# Altium PCB Hexbot_电源.PcbDoc
Units mm, origin at the board's own origin, x right, y up, seen from the top; angles counter-clockwise.
Board outline 79.95 x 69.34 mm, 2 copper layers (Top Layer, Bottom Layer); 25 components, 13 nets, 100 pads, 4 vias.
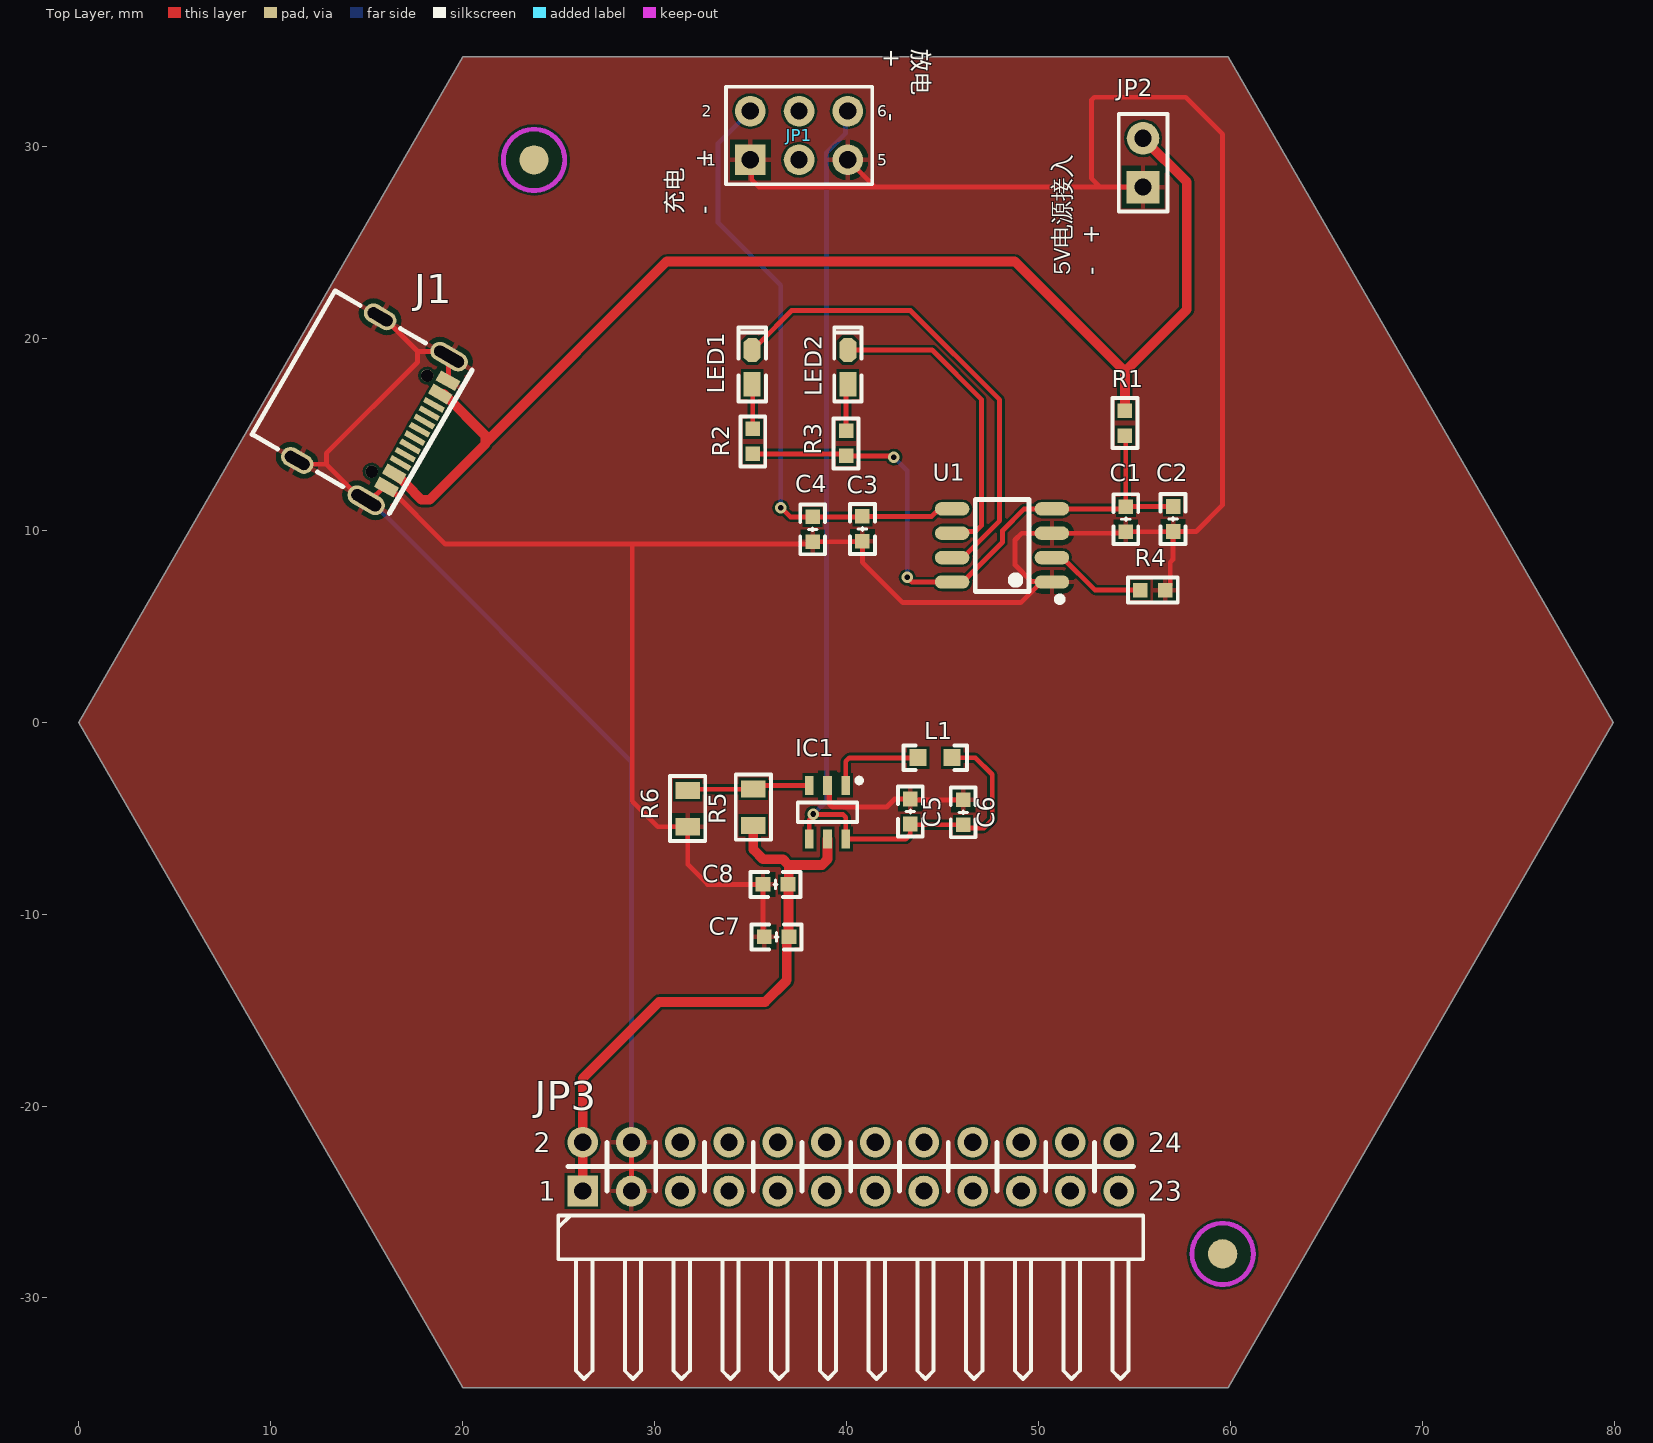
[diagram p0: Top Layer view]
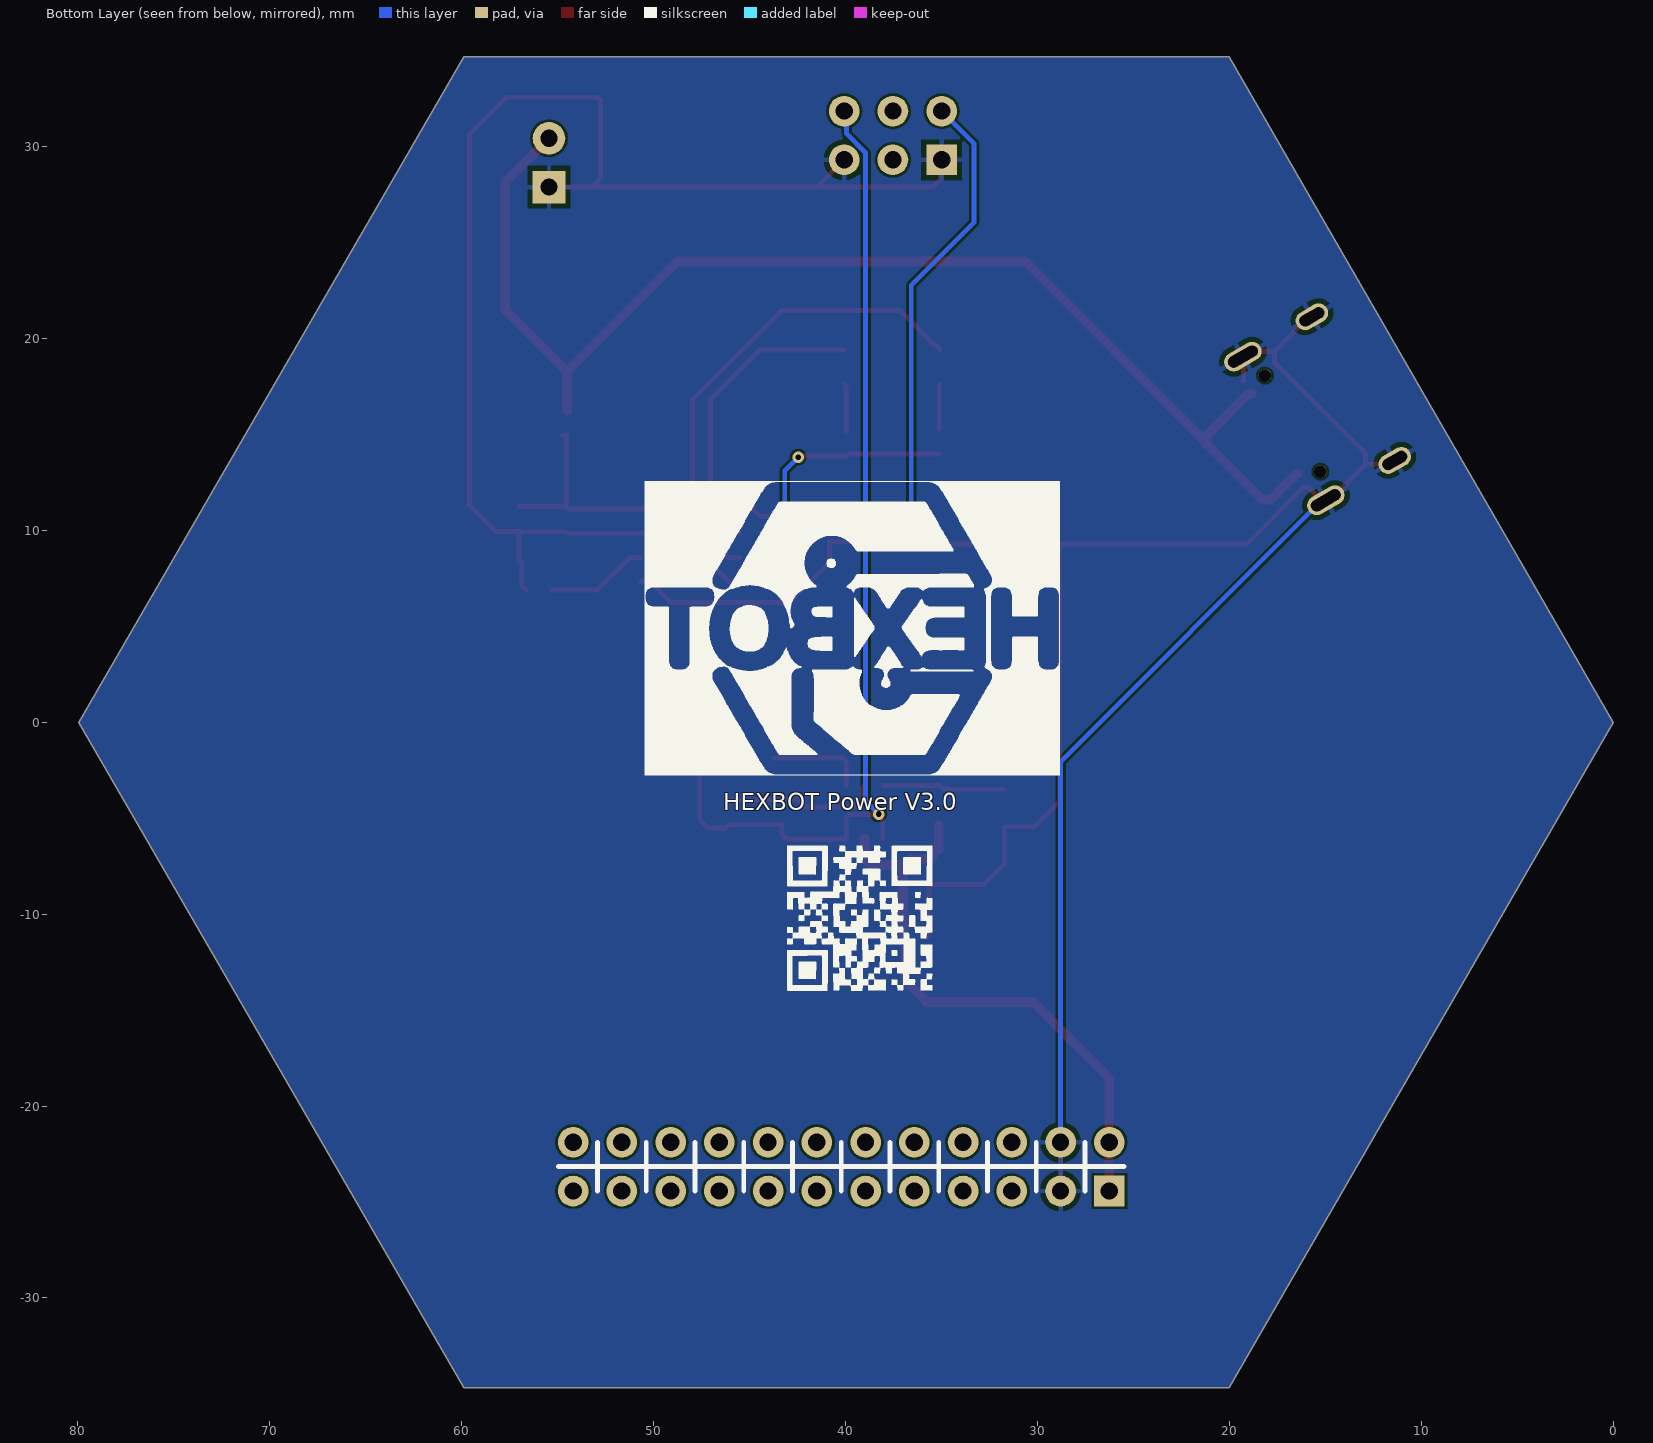
[diagram p1: Bottom Layer view, seen from below]

## Layer stack, top to bottom
Top Solder: solder mask 0.0102, Solder Resist, Dk 3.5
Top Layer: signal copper 0.0356
Dielectric 1: dielectric 0.32, FR-4, Dk 4.8
Bottom Layer: signal copper 0.0356
Bottom Solder: solder mask 0.0102, Solder Resist, Dk 3.5

## Board outline
20.005,-34.667 -0.005,-0.006 20.005,34.675 59.883,34.675 79.949,-0.006 59.883,-34.667

## Design rules (kind name [scope] priority, off if disabled: settings)
Clearance [All] p1: gap=0.127 ignorepadtopadclearanceinfootprint=FALSE
ComponentClearance [All] p1: gap=0 collisioncheckmode=3 verticalgap=0.254 showdistances=FALSE
MinimumSolderMaskSliver [All] p1: minsoldermaskwidth=0
PolygonConnect [All] p1: connectstyle=Relief reliefconductorwidth=0.254 reliefentries=4 polygonreliefangle="90 Angle" airgapwidth=0.254
RoutingVias [All] p1: holewidth=0.254 width=0.508 viastyle="Through Hole" minholewidth=0.254 minwidth=0.508 maxholewidth=0.711 maxwidth=1.27
SilkToSilkClearance [All] p1: silktosilkclearance=0
SilkToSolderMaskClearance [IsPad] p1: minsilkscreentomaskgap=0 clearancetoexposedcopper=TRUE
SolderMaskExpansion [All] p1: expansion=0.102 istentingtop=FALSE
Width [All] p1: maxlimit=0.508 minlimit=0.254 preferedwidth=0.254
26 further rules are at their usual default settings.

## Classes and differential pairs
component class hexbot_电源: C1 C2 C3 C4 C5 C6 C7 C8 IC1 J1 JP1 JP2 JP3 L1 LED1 LED2 R1 R2 R3 R4 R5 R6 U1

## Components (designator, comment, footprint, x,y, rotation, side; value= is the part's Value field where it differs from the comment)
C1 "10uF" "C 0603_L" 54.551,10.577 r90 top
C2 "0.1uF" "C 0603_L" 57.019,10.589 r90 top
C3 "10uF" "C 0603_L" 40.823,10.074 r90 top
C4 "0.1uF" "C 0603_L" 38.237,10.053 r90 top
C5 "10uF" "C 0603_L" 43.322,-4.65 r270 top
C6 "0.1uF" "C 0603_L" 46.08,-4.692 r270 top
C7 "10uF" "C 0603_L" 36.353,-11.184 r0 top
C8 "0.1uF" "C 0603_L" 36.3,-8.447 r0 top
IC1 "PS7516" SOT23-6L 39.009,-4.687 r180 top
J1 "Type-C" Type-C-16 14.645,16.842 r240 top
JP1 "Header3X2" HDR2.54-LI-2x3P 37.528,30.573 r0 top
JP2 "HDR-1X2" HDR2.54-LI-2P 55.45,29.154 r90 top
JP3 "Header 2X11" HDR2.54-WI-2x12P 40.22,-23.157 r0 top
L1 "10uH" "L 0603" 44.617,-1.847 r180 top
LED1 "红色" "LED 0603R" 35.091,18.507 r90 top
LED2 "红色" "LED 0603R" 40.075,18.507 r90 top
Mark1 "Mark" Mark 59.6,-27.7 r90 top
Mark2 "Mark" Mark 23.716,29.301 r90 top
R1 "0.5R" "R 0603_L" 54.503,15.585 r270 top
R2 "1K" "R 0603_L" 35.115,14.636 r90 top
R3 "1K" "R 0603_L" 39.977,14.531 r90 top
R4 "1.2K" "R 0603_L" 55.96,6.882 r180 top
R5 "525K" "R 0805_L" 35.143,-4.424 r270 top
R6 "100K" "R 0805_L" 31.726,-4.497 r90 top
U1 "TP4056_JX" TP4056 47.783,9.273 r90 top

## Footprints (in the part's own frame and the unit in brackets; to place one, negate y for a bottom-side part, rotate by r counter-clockwise, add the part's x,y. Pads: shape width x height; smd on the part's side, far side on the other; paste and mask are expansions set on the pad)
"C 0603_L" [mil] "无极性贴片电容                                       淘宝ID:黄晶宝石"
  rect 30x30 smd: 1(-25.59,0) 2(25.59,0)
  silkscreen extent -51,-26 51,26, body extent -31,-16 31,16, height 32
HDR2.54-LI-2P [mm] "封装库来自淘宝卖家 ID：黄晶宝石"
  rect 1.7x1.7 hole 0.9: 1(-1.27,0)
  round 1.7 hole 0.9: 2(1.27,0)
  silkscreen extent -2.54,-1.27 2.54,1.27, body extent -2.54,-1.27 2.54,1.27, height 8.5
HDR2.54-LI-2x3P [mm] "封装库来自淘宝卖家 ID：黄晶宝石"
  rect 1.6x1.6 hole 0.9: 1(-2.54,-1.27)
  round 1.6 hole 0.9: 2(-2.54,1.27) 3(0,-1.27) 4(0,1.27) 5(2.54,-1.27) 6(2.54,1.27)
  silkscreen extent -3.81,-2.54 3.81,2.54, body extent -3.81,-2.54 3.81,2.54, height 8.5
HDR2.54-WI-2x12P [mm] "双排弯脚排针，12x2脚  淘宝ID:黄晶宝石   店铺网址:https://shop463601444.taobao.com"
  rect 1.6x1.6 hole 0.9: 1(-13.97,-1.27)
  round 1.6 hole 0.9: 2(-13.97,1.27) 3(-11.43,-1.27) 4(-11.43,1.27) 5(-8.89,-1.27) 6(-8.89,1.27) 7(-6.35,-1.27) 8(-6.35,1.27) 9(-3.81,-1.27) 10(-3.81,1.27) 11(-1.27,-1.27) 12(-1.27,1.27) 13(1.27,-1.27) 14(1.27,1.27) 15(3.81,-1.27) 16(3.81,1.27) 17(6.35,-1.27) 18(6.35,1.27) 19(8.89,-1.27) 20(8.89,1.27) 21(11.43,-1.27) 22(11.43,1.27) 23(13.97,-1.27) 24(13.97,1.27)
  silkscreen extent -15.24,-11.06 15.24,1.27, body extent -15.24,-11.23 15.24,1.62, height 5.1
"L 0603" [mil] "小功率贴片电感        淘宝ID:黄晶宝石"
  rect 35x35 smd: 1(-35,0) 2(35,0)
  silkscreen extent -65,-25 65,25, body extent -31,-16 31,16, height 31
"LED 0603R" [mil] "红色0603LED                                           淘宝ID:黄晶宝石"
  rect 50x35 smd: 1(-35,0.26)
  oct 50x35 smd: 2(35,0.26)
  silkscreen extent -71,-28 81,28, body extent -31,-16 31,16, height 18
Mark [mil]
  round 60 smd mask+39.37: mark(0,0)
  Top Layer keep-out circle w10: c0,0 r62.99
"R 0603_L" [mil] "1/10W贴片电阻                 淘宝ID:黄晶宝石"
  rect 30x30 smd: 1(-25.59,0) 2(25.59,0)
  silkscreen extent -51,-26 51,26, body extent -31,-16 32,16, height 16
"R 0805_L" [mil] "1/8W贴片电阻"
  rect 35x50 smd: 1(-37.41,0) 2(37.4,0)
  silkscreen extent -67,-36 67,36, body extent -39,-25 39,25, height 20
SOT23-6L [mm] "3x1.6x1.1mm(长宽高) 封装库来自淘宝卖家 ID：黄晶宝石"
  rect 0.45x1 smd: 1(-0.95,-1.397) 2(0,-1.397) 3(0.95,-1.397) 4(0.95,1.397) 5(0,1.397) 6(-0.95,1.397)
  silkscreen extent -1.78,-1.78 1.55,0.51, body extent -1.5,-1.4 1.5,1.4, height 1.15
TP4056 [mm]
  oval 0.7x1.8 smd: 1(-1.966,-2.921) 2(-0.696,-2.921) 3(0.574,-2.921) 4(1.844,-2.921) 5(1.844,2.281) 6(0.574,2.281) 7(-0.696,2.281) 8(-1.966,2.281)
  silkscreen extent -3.01,-3.47 2.34,1.08
Type-C-16 [mm]
  rect 0.6x1.15 smd: 1(-3.116,3.496) 2(-2.316,3.496) 11(2.484,3.496) 12(3.284,3.496)
  rect 0.3x1.15 smd: 3(-1.666,3.496) 4(-1.166,3.496) 5(-0.666,3.496) 6(-0.166,3.496) 7(0.334,3.496) 8(0.834,3.496) 9(1.334,3.496) 10(1.834,3.496)
  oval 1x2.1 hole 0.6 slot 1.7 at 90 deg: 20(-4.236,2.921) 22(4.404,2.921)
  oval 1x1.8 hole 0.6 slot 1.4 at 90 deg: 21(-4.236,-1.228) 22(4.404,-1.228)
  round 0.65 hole 0.65 unplated: ""(-2.806,2.422) ""(2.974,2.422)
  silkscreen extent -4.23,-3.95 4.4,4.31

## Part data
C1 C2 C3 C4 C5 C6 C7 C8: library part C, "贴片电容", BOM名称=无极性贴片电容, 唯一出售店铺网址=https://shop463601444.taobao.com, 淘宝ID="封装库来自淘宝 ID：黄晶宝石", 联系售后，技术支持=https://shop463601444.taobao.com
IC1: library part SX1308, "可调升压芯片", BOM名称=可调升压芯片, 学习资源=www.ooocke.com, 版权归属="封装库来自淘宝 ID：黄晶宝石"
J1: library part Type-C-16pin
JP1: library part "Header 3X2", "3*2P接插件", BOM名称=3*2P接插件, 学习资源=https://shop463601444.taobao.com, 版权归属="封装库来自淘宝 ID：黄晶宝石"
JP2: library part "Header 2", "2P接插件", BOM名称=2P接插件, 版权归属="封装库来自淘宝 ID：黄晶宝石", 联系售后=https://shop463601444.taobao.com
JP3: library part "Header 12X2", "12*2P接插件", BOM名称=12*2P接插件, 学习资源=https://shop463601444.taobao.com, 版权归属="封装库来自淘宝卖家 ID：黄晶宝石"
L1: library part L, "小功率贴片电感", BOM名称=小功率贴片电感, 封装库来自淘宝卖家 ID：黄晶宝石=其他店铺购入均为盗版，不享受售后技术支持服务，请立即申请退款, 淘宝ID="封装库来自淘宝 ID：黄晶宝石", 联系售后=https://shop463601444.taobao.com
LED1 LED2: library part LED-SMD, "贴片LED", BOM名称=贴片LED, 学习资源=https://shop463601444.taobao.com, 版权归属="封装库来自淘宝 ID：黄晶宝石"
R1 R2 R3 R4 R5 R6: library part R, "贴片电阻", BOM名称=贴片电阻, 封装库来自淘宝卖家 ID：黄晶宝石=其他店铺购入均为盗版，不享受售后技术支持服务，请立即申请退款, 版权归属="来自淘宝 ID：黄晶宝石", 联系售后=https://shop463601444.taobao.com
U1: BOM_Supplier=LCSC, spicePre=U

## Via types
v1: diameter 0.6, hole 0.3, Top Layer to Bottom Layer, tented both sides, 4 vias

## Nets (pads, with @x,y where several pads share a name; then routed paths per layer and width w, separated by ;. In a path a pad name is that pad's centre, name@x,y a point inside that pad or via, vN(x,y) a via of type N, cw(c..) or ccw(c..) an arc to the next point about the centre after c; other vN are vias at no path point)
3V7: C5.2 C6.2 IC1.4 IC1.6 JP1.6 L1.1 | length 55
  Top Layer w0.254: IC1.4 38.059,-5.091 38.268,-4.881 v1(38.268,-4.788) 38.279,-4.798 39.81,-4.798 39.959,-4.947 IC1.6 43.082,-6.084 43.322,-5.843 C5.2 43.364,-5.342 C6.2 46.253,-5.516 47.153,-5.516 47.59,-5.079 47.59,-2.724 46.713,-1.847 L1.1
  Bottom Layer w0.254: v1(38.268,-4.788) 38.954,-4.102 38.954,29.68 39.936,30.662 39.936,31.712 JP1.6
5V: C7.2 C8.2 IC1.5 JP3.1 JP3.2 R5.2 | length 31.3
  Top Layer w0.508: JP3.1 JP3.2 26.25,-18.553 30.232,-14.571 35.759,-14.571 36.886,-13.444 36.886,-11.248 36.977,-11.157 36.977,-8.474 C8.2 36.987,-8.41 36.987,-7.436 ; R5.2 35.143,-6.628 35.653,-7.139 36.69,-7.139 36.987,-7.436 ; IC1.5 39.013,-6.087 39.013,-7.139 38.715,-7.436 36.987,-7.436
BAT: C3.2 C4.2 JP1.2 U1.5 | length 32
  Top Layer w0.254: v1(36.573,11.173) 36.595,11.173 37.066,10.703 C4.2 40.802,10.703 C3.2 44.438,10.724 44.831,11.118 U1.5
  Bottom Layer w0.254: JP1.2 33.295,30.15 33.295,26.046 36.573,22.767 v1(36.573,11.173)
FB: IC1.3 R5.1 R6.2 | length 6.4
  Top Layer w0.254: R6.2@31.734,-3.493 34.906,-3.493 34.911,-3.488 35.109,-3.29 IC1.3
GND: C1.1 C2.1 C3.1 C4.1 C5.1 C6.1 C7.1 C8.1 IC1.2 J1.1 J1.12 J1.20 J1.21 J1.22 JP1.1 JP1.5 JP2.1 JP3.3 JP3.4 R4.1 R6.1 U1.1 U1.3 | length 206.9
  Top Layer w0.254: J1.22@11.379,13.642 11.579,13.442 12.896,13.442 ; J1.21 15.845,21.124 17.645,19.324 ; J1.1 19.251,17.812 19.251,19.008 J1.20 19.018,19.324 17.645,19.324 ; JP3.3 JP3.4 ; JP1.1 35.058,29.233 35.058,28.271 35.445,27.884 41.487,27.884 ; C7.1 35.65,-11.131 C8.1 32.764,-8.447 31.726,-7.409 R6.1 30.17,-5.447 28.837,-4.114 28.837,9.284 ; IC1.2 39.107,-3.388 39.107,-4.269 39.256,-4.417 42.087,-4.417 42.504,-4 C5.1 43.364,-4.042 C6.1 ; JP1.5 41.487,27.884 ; U1.1@50.685,7.327 U1.1@50.173,7.327 ; JP2.1 53.224,27.884 ; R4.1 56.864,7.136 56.864,8.339 57.007,8.482 57.007,9.927 C1.1 54.471,9.848 U1.3 49.131,9.848 48.777,9.494 48.777,8.198 49.647,7.327 U1.1@50.173,7.327 ; C2.1 58.213,9.939 59.597,11.323 59.597,30.632 57.664,32.564 52.906,32.564 52.757,32.415 52.757,28.351 53.224,27.884 ; 12.896,13.442 12.896,14.009 17.645,18.758 17.645,19.324 ; 12.896,13.442 14.771,11.567 14.973,11.567 15.198,11.567 15.881,12.249 J1.12 16.131,12.249 19.097,9.284 28.837,9.284 ; 28.837,9.284 38.119,9.284 C4.1 40.802,9.403 C3.1 40.823,8.344 42.934,6.234 49.08,6.234 U1.1@50.173,7.327 ; 41.487,27.884 53.224,27.884
  Bottom Layer w0.254: J1.22@14.973,11.567 15.174,11.567 28.79,-2.05 JP3.4
LX: IC1.1 L1.2 | length 5.1
  Top Layer w0.254: IC1.1 39.959,-2.04 40.141,-1.857 43.717,-1.857 L1.2
NetC1_2: C1.2 C2.2 R1.2 R2.1 R3.1 U1.4 U1.8 | length 33.7
  Top Layer w0.254: R2.1 R3.1@39.85,13.986 ; R3.1 42.393,13.881 v1(42.463,13.811) ; v1(43.162,7.549) 43.404,7.308 U1.8 46.052,7.308 48.124,9.38 48.124,9.986 49.256,11.118 U1.4 54.441,11.118 C1.2 ; R1.2@54.752,14.935 R1.2 54.551,14.887 C1.2 ; C2.2 54.563,11.239 C1.2
  Bottom Layer w0.254: v1(42.463,13.811) 43.162,13.112 v1(43.162,7.549)
NetLED1_1: LED1.1 R2.2 | length 2.3
  Top Layer w0.254: LED1.1 35.116,17.588 R2.2
NetLED1_2: LED1.2 U1.7 | length 25.3
  Top Layer w0.254: LED1.2 35.085,19.439 35.402,19.757 35.445,19.757 37.142,21.454 43.326,21.454 47.976,16.804 47.976,10.502 46.052,8.578 U1.7
NetLED2_1: LED2.1 R3.2 | length 2.5
  Top Layer w0.254: R3.2 39.978,17.527 LED2.1
NetLED2_2: LED2.2 U1.6 | length 16.3
  Top Layer w0.254: LED2.2 44.459,19.397 47.026,16.83 47.026,10.246 46.712,9.933 45.587,9.933 U1.6
NetR4_2: R4.2 U1.2 | length 5.3
  Top Layer w0.254: U1.2 51.254,8.578 52.95,6.882 R4.2
VCC: J1.2 J1.11 JP2.2 R1.1 | length 68.3
  Top Layer w0.508: J1.11 16.497,12.942 17.06,12.38 17.06,12.376 17.848,11.588 18.269,11.588 21.188,14.507 21.188,14.564 ; J1.2 19.017,17.099 21.188,14.928 ; 21.188,14.874 21.188,14.564 ; JP2.2 57.73,28.145 57.73,21.496 54.503,18.269 ; 21.188,14.564 21.343,14.719 30.629,24.005 48.767,24.005 54.503,18.269 ; 54.503,18.269 R1.1 54.503,18.269
pads on no net: J1. J1.3 J1.4 J1.5 J1.6 J1.7 J1.8 J1.9 J1.10 JP1.3 JP1.4 JP3.5 JP3.6 JP3.7 JP3.8 JP3.9 JP3.10 JP3.11 JP3.12 JP3.13 JP3.14 JP3.15 JP3.16 JP3.17 JP3.18 JP3.19 JP3.20 JP3.21 JP3.22 JP3.23 JP3.24 Mark1.mark Mark2.mark

## Polygon pours and split planes (outlines as drawn)
GND on Bottom Layer "Top Layer-No Net" (solid, pour order 0): 20.005,-34.667 -0.005,-0.006 20.005,34.675 59.883,34.675 79.949,-0.006 59.883,-34.667
GND on Top Layer "Top Layer-No Net1" (solid, remove dead copper, pour order 1): 20.005,-34.667 -0.005,-0.006 20.005,34.675 59.883,34.675 79.949,-0.006 59.883,-34.667

## Silkscreen, mask and mechanical layers (free items; w line width, h text height)
Top Overlay:
  text "放电 / +      -" at 41.62,35.097 h1.52 r270
  text "充电 / -     +" at 33.311,26.472 h1.52 r90
  text "5V电源接入 / -   +" at 53.484,23.285 h1.52 r90
Bottom Overlay:
  drawing of 3021 lines, arcs and shapes, not listed
  text "HEXBOT Power V3.0" at 46.357,-4.867 h1.5
Mechanical 1:
  lines w0.254: -0.005,-0.006 20.005,-34.667 24.069,-34.667 55.819,-34.667 59.883,-34.667 79.949,-0.006 59.883,34.675 20.005,34.675 -0.005,-0.006

## Text inside footprints (layer, text, board x,y; h text height)
JP1: Top Overlay "1" at 32.702,28.795 h1.02; Top Overlay "2" at 32.448,31.335 h1.02; Top Overlay "5" at 41.592,28.795 h1.02; Top Overlay "6" at 41.592,31.335 h1.02
JP3: Top Overlay "1" at 23.964,-24.935 h1.02; Top Overlay "2" at 23.71,-22.395 h1.02; Top Overlay "23" at 55.714,-24.935 h1.02; Top Overlay "24" at 55.714,-22.395 h1.02